# Altium PCB GMAX4651_MB.PcbDoc (part 1 of 2)
Units mm, origin at the board's own origin, x right, y up, seen from the top; angles counter-clockwise.
Board outline 185 x 150 mm, 2 copper layers (Top Layer, Bottom Layer); 162 components, 61 nets, 664 pads, 401 vias.
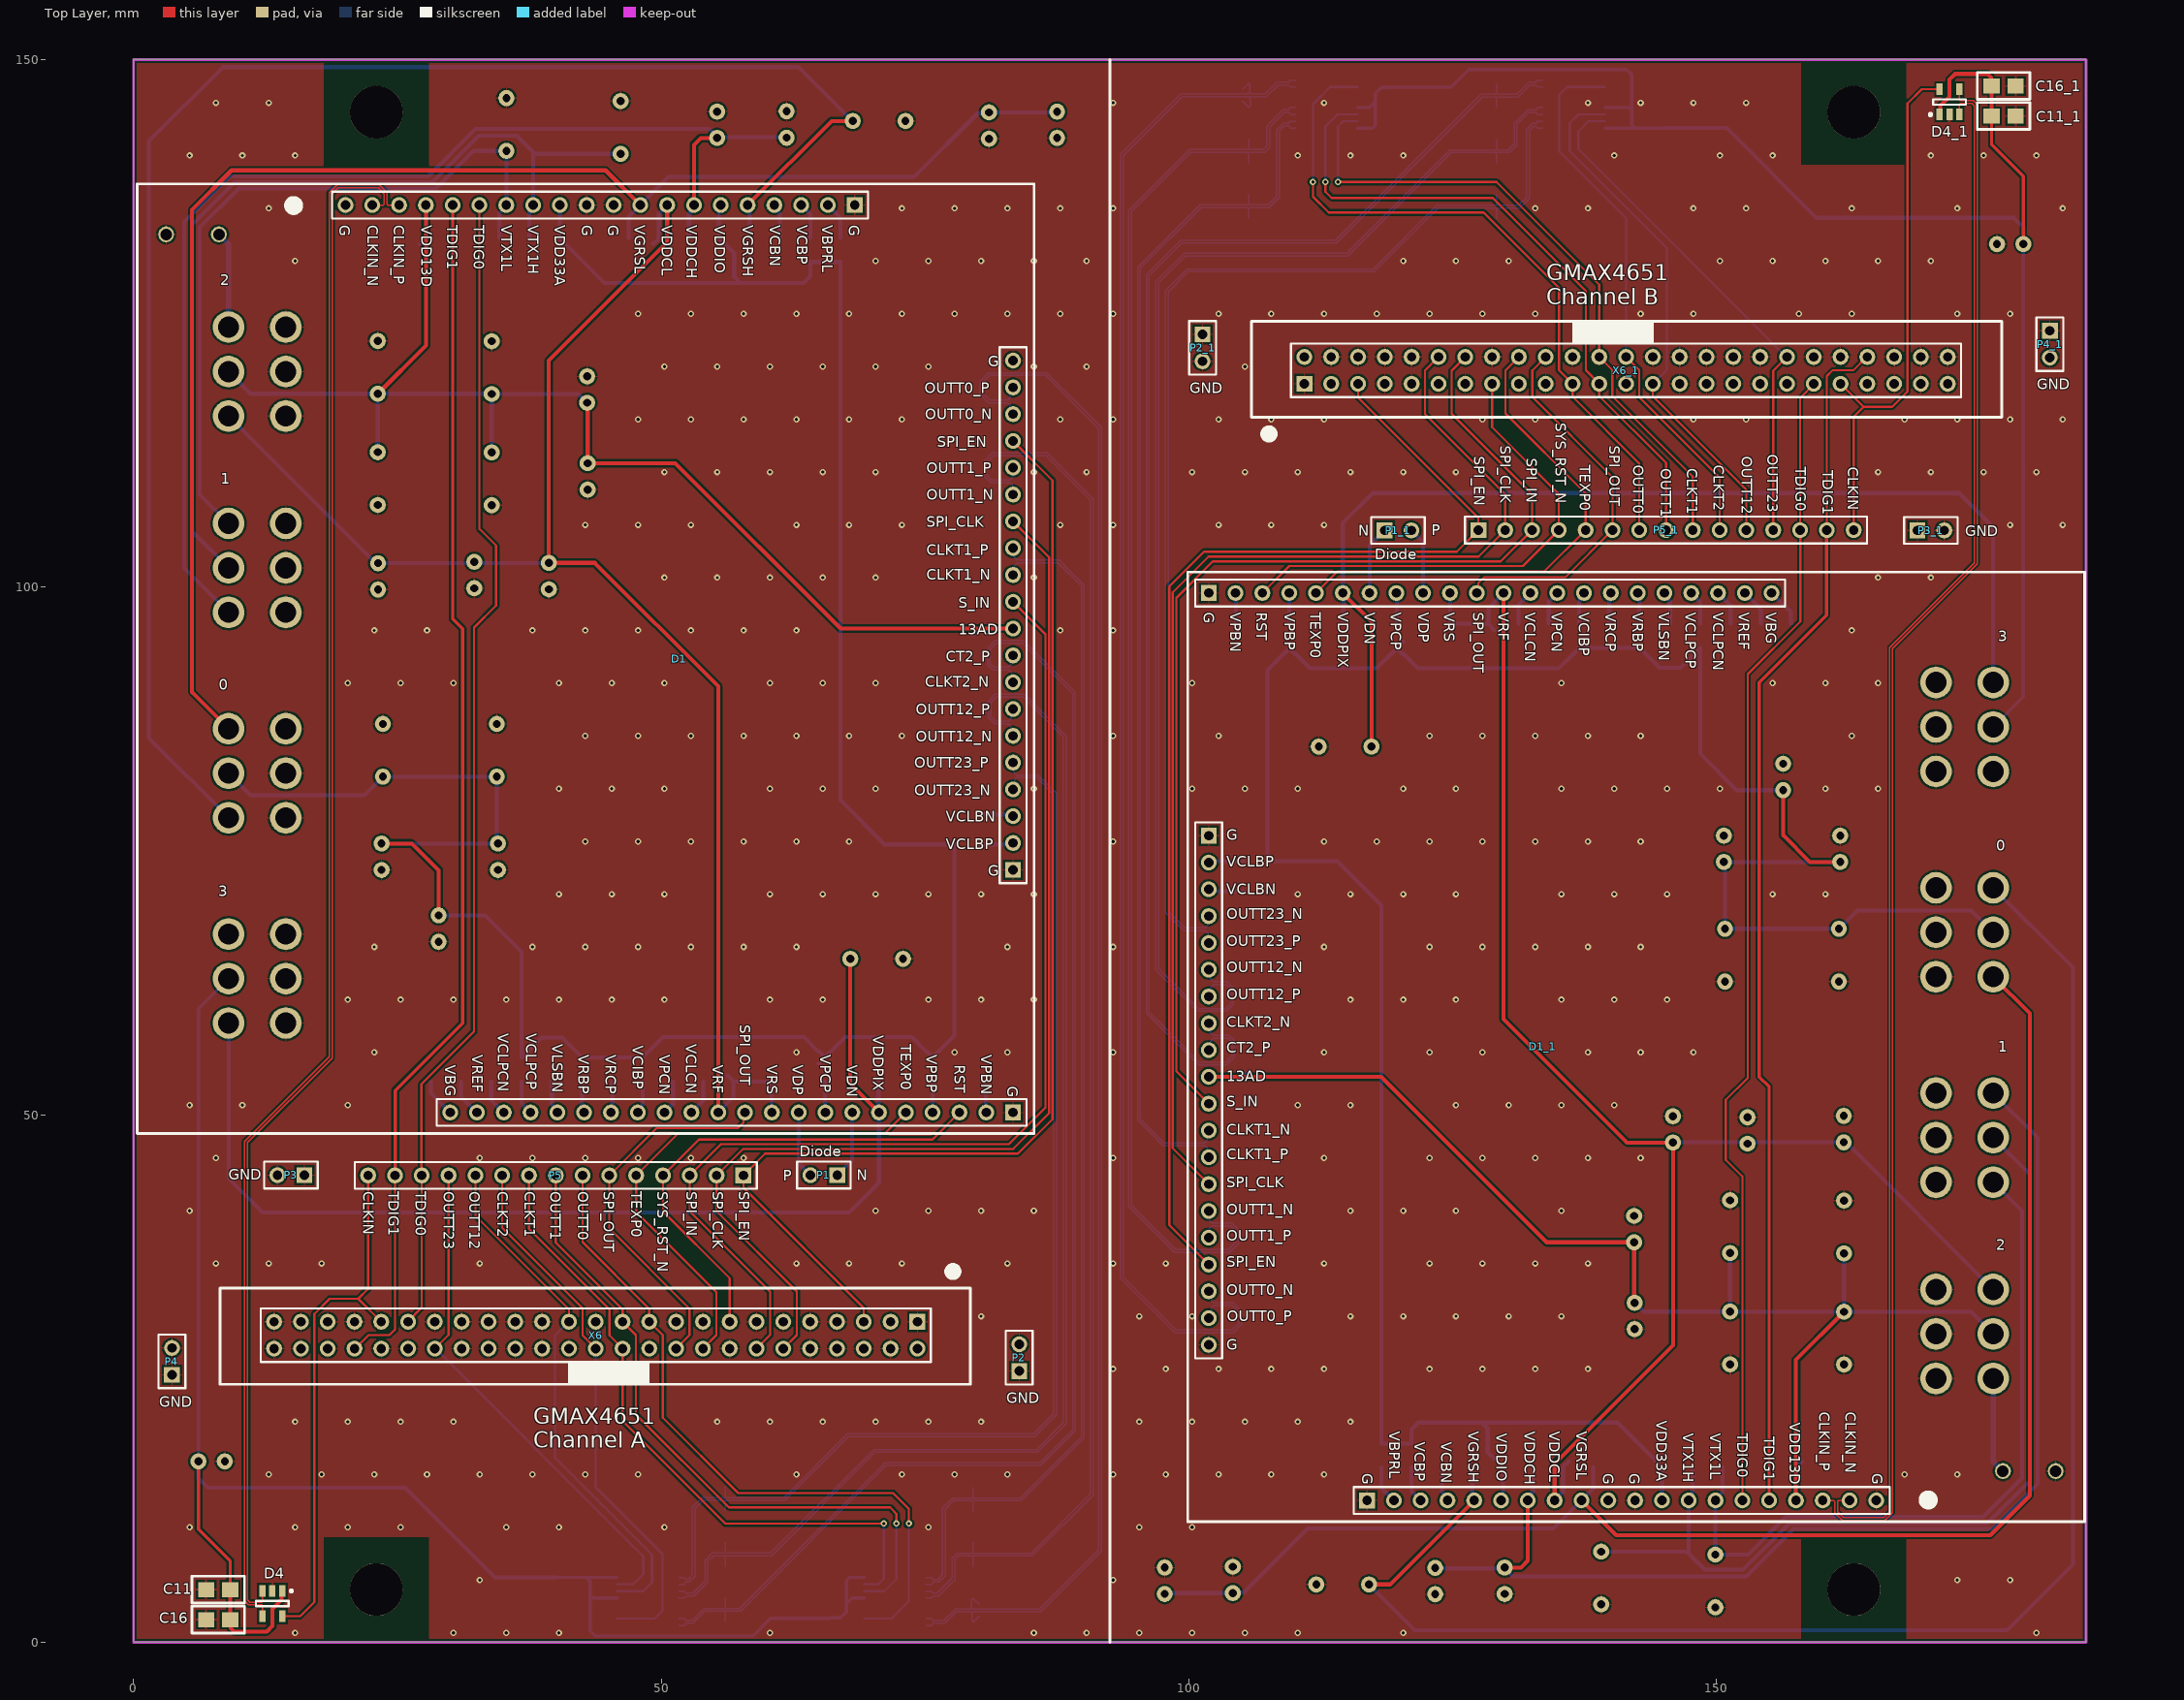
[diagram p0: Top Layer view]
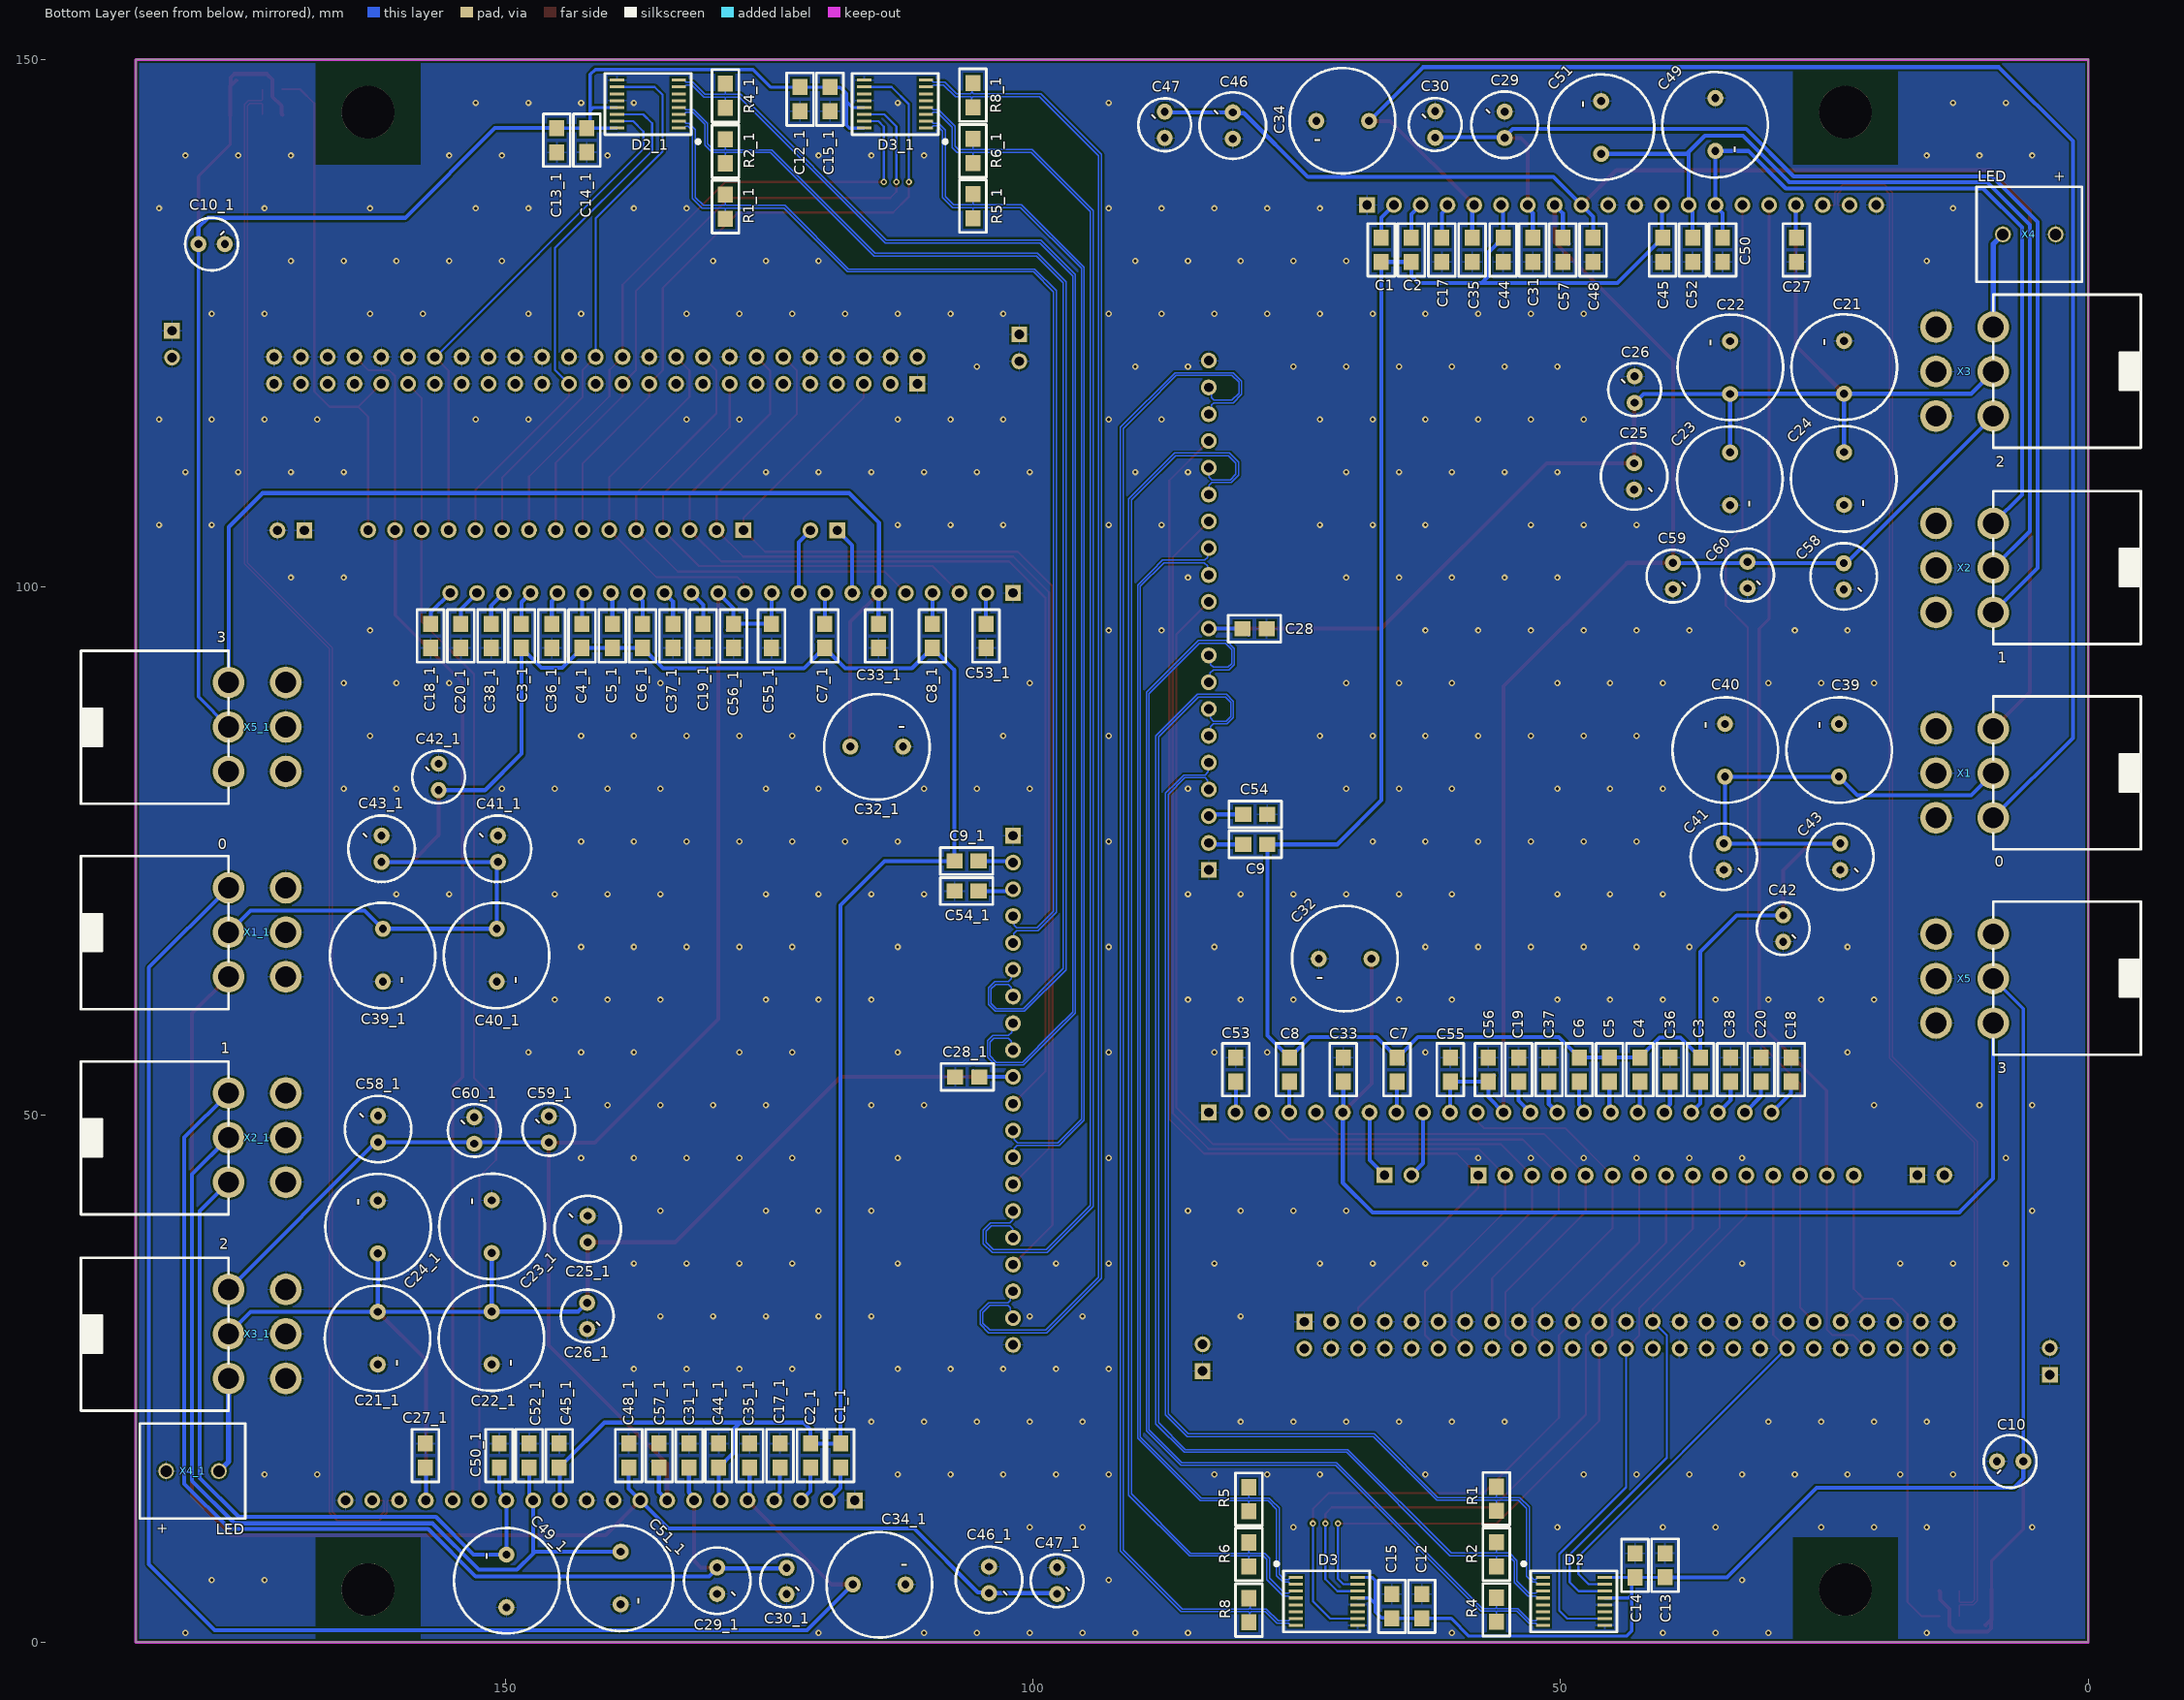
[diagram p1: Bottom Layer view, seen from below]

## Layer stack, top to bottom
Top Solder: solder mask 0.0102, Solder Resist, Dk 3.5
Top Layer: signal copper 0.0356
Dielectric 1: dielectric 0.32, FR-4, Dk 4.8
Bottom Layer: signal copper 0.0356
Bottom Solder: solder mask 0.0102, Solder Resist, Dk 3.5

## Board outline
0,0 0,150 185,150 185,0

## Design rules (kind name [scope] priority, off if disabled: settings)
BoardOutlineClearance [OnLayer('Multi-Layer')] p1: gap=0.254 ignorepadtopadclearanceinfootprint=FALSE except(0: Arc-SplitContinuation Track-SplitContinuation SMDPad-SplitContinuation THPad-SplitContinuation Via-SplitContinuation Fill-SplitContinuation Poly-SplitContinuation Region-SplitContinuation Text-SplitContinuation; 0.4: Arc-OutlineEdge Track-OutlineEdge SMDPad-OutlineEdge THPad-OutlineEdge Via-OutlineEdge Fill-OutlineEdge Poly-OutlineEdge Region-OutlineEdge Text-OutlineEdge)
Clearance [All] p1: gap=0.125 ignorepadtopadclearanceinfootprint=FALSE except(0.2: Arc-Fill Arc-Poly Track-Fill Track-Poly SMDPad-Fill SMDPad-Poly THPad-Fill THPad-Poly Via-Fill Via-Poly Fill-Fill Fill-Poly Poly-Poly Poly-Region Poly-Text; 0.25: Arc-Hole Track-Hole SMDPad-Hole THPad-Hole Via-Hole Fill-Hole Poly-Hole Region-Hole Text-Hole) // Standart
DiffPairsRouting [All] p1: maxlimit=0.254 minlimit=0.127 mostfreqgap=0.13 toplayer_minwidth=0.127 toplayer_maxwidth=0.381 toplayer_prefwidth=0.37 bottomlayer_minwidth=0.127 bottomlayer_maxwidth=0.381 bottomlayer_prefwidth=0.37 maxuncoupledlength=12.7
HoleSize [All] p1: absolutevalues=TRUE maxlimit=5 minlimit=0.3 maxpercent=80.000 minpercent=20.000
MinimumSolderMaskSliver [All] p1: minsoldermaskwidth=0.1
PlaneClearance "PlaneClearance-1 1/2 Oz" [All] p1: clearance=0.2 // Standart
PlaneConnect "TermalConnect-1 1/2 Oz" [All] p1: planeconnectstyle=Relief reliefexpansion=0.2 reliefentries=4 reliefconductorwidth=0.2 reliefairgap=0.2 // Standart
PolygonConnect "PolygonConnect-1 1/2 Oz" [All] p1: thpad.connectstyle=Relief thpad.reliefconductorwidth=0.15 thpad.reliefentries=4 thpad.polygonreliefangle="90 Angle" thpad.airgapwidth=0.2 smdpad.connectstyle=Relief smdpad.reliefconductorwidth=0.2 smdpad.reliefentries=4 smdpad.polygonreliefangle="90 Angle" smdpad.airgapwidth=0.2 via.connectstyle=Direct via.reliefconductorwidth=0.254 via.reliefentries=4 via.polygonreliefangle="90 Angle" via.airgapwidth=0.254 // Standart
RoutingVias [All] p1: holewidth=0.3 width=1.27 viastyle="Through Hole" minholewidth=0.3 minwidth=0.6 maxholewidth=0.711 maxwidth=1.27
SilkToSilkClearance [All] p1: silktosilkclearance=0
SilkToSolderMaskClearance [IsPad] p1: minsilkscreentomaskgap=0 clearancetoexposedcopper=TRUE
SolderMaskExpansion [All] p1: expansion=0.102 istentingtop=FALSE
UnRoutedNet [All] p1: checkbadconnections=TRUE
Width [All] p1: maxlimit=2.5 minlimit=0.125 preferedwidth=0.37
22 further rules are at their usual default settings.

## Classes and differential pairs
component class Sheet1_GMAX4651_MB: C1 C2 C3 C4 C5 C6 C7 C8 C9 C10 C11 C12 C13 C14 C15 C16 C17 C18 C19 C20 C21 C22 C23 C24 C25 C26 C27 C28 C29 C30 C31 C32 C33 C34 C35 C36 C37 C38 C39 C40 C41 C42 C43 C44 C45 C46 C47 C48 C49 C50 C51 C52 C53 C54 C55 C56 C57 C58 C59 C60 D1 D2 D3 D4 P1 P2 P3 P4 P5 R1 R2 R4 R5 R6 R8 X1 X2 X3 X4 X5 X6
differential pair OUTT0: +OUTT0_P -OUTT0_N
differential pair OUTT23: +OUTT23_P -OUTT23_N
differential pair OUTT12: +OUTT12_P -OUTT12_N
differential pair OUTT1: +OUTT1_P -OUTT1_N
differential pair CLKT2: +CLKT2_P -CLKT2_N
differential pair CLKT1: +CLKT1_P -CLKT1_N
differential pair CLKIN: +CLKIN_P -CLKIN_N

## Components (designator, comment, footprint, x,y, rotation, side; value= is the part's Value field where it differs from the comment)
C1 "0,1 мкФ" CAP_SMALL 68.246,134.468 r270 bottom
C1_1 "0,1 мкФ" CAP_SMALL 116.958,15.181 r90 bottom (schematic designator C1)
C2 "0,1 мкФ" CAP_SMALL 65.401,134.468 r270 bottom
C2_1 "0,1 мкФ" CAP_SMALL 119.803,15.181 r90 bottom (schematic designator C2)
C3 "0,1 мкФ" CAP_SMALL 35.48,51.765 r90 bottom
C3_1 "0,1 мкФ" CAP_SMALL 149.724,97.883 r270 bottom (schematic designator C3)
C4 "0,1 мкФ" CAP_SMALL 41.22,51.765 r90 bottom
C4_1 "0,1 мкФ" CAP_SMALL 143.984,97.883 r270 bottom (schematic designator C4)
C5 "0,1 мкФ" CAP_SMALL 44.091,51.765 r90 bottom
C5_1 "0,1 мкФ" CAP_SMALL 141.114,97.883 r270 bottom (schematic designator C5)
C6 "0,1 мкФ" CAP_SMALL 46.961,51.765 r90 bottom
C6_1 "0,1 мкФ" CAP_SMALL 138.244,97.883 r270 bottom (schematic designator C6)
C7 "0,1 мкФ" CAP_SMALL 64.233,51.765 r90 bottom
C7_1 "0,1 мкФ" CAP_SMALL 120.972,97.883 r270 bottom (schematic designator C7)
C8 "0,1 мкФ" CAP_SMALL 74.418,51.765 r90 bottom
C8_1 "0,1 мкФ" CAP_SMALL 110.786,97.883 r270 bottom (schematic designator C8)
C9 "0,1 мкФ" CAP_SMALL 81.429,74.346 r180 bottom
C9_1 "0,1 мкФ" CAP_SMALL 103.776,75.302 r0 bottom (schematic designator C9)
C10 "22 мкФ" Cap_0511_electrolitic 7.391,17.145 r0 bottom
C10_1 "22 мкФ" Cap_0511_electrolitic 177.813,132.503 r180 bottom (schematic designator C10)
C11 "0,1 мкФ" CAP_SMALL 5.499,3.724 r0 top
C11_1 "0,1 мкФ" CAP_SMALL 179.705,145.924 r180 top (schematic designator C11)
C12 "0,1 мкФ" CAP_SMALL 64.411,5.918 r270 bottom
C12_1 "0,1 мкФ" CAP_SMALL 120.794,143.73 r90 bottom (schematic designator C12)
C13 "0,1 мкФ" CAP_SMALL 41.373,9.804 r270 bottom
C13_1 "0,1 мкФ" CAP_SMALL 143.832,139.844 r90 bottom (schematic designator C13)
C14 "0,01 мкФ" CAP_SMALL 44.206,9.795 r270 bottom
C14_1 "0,01 мкФ" CAP_SMALL 140.998,139.853 r90 bottom (schematic designator C14)
C15 "0,01 мкФ" CAP_SMALL 67.25,5.918 r270 bottom
C15_1 "0,01 мкФ" CAP_SMALL 117.954,143.73 r90 bottom (schematic designator C15)
C16 "0,01 мкФ" CAP_SMALL 5.499,0.88 r0 top
C16_1 "0,01 мкФ" CAP_SMALL 179.705,148.769 r180 top (schematic designator C16)
C17 "0,1 мкФ" CAP_SMALL 62.506,134.468 r270 bottom
C17_1 "0,1 мкФ" CAP_SMALL 122.699,15.181 r90 bottom (schematic designator C17)
C18 "0,1 мкФ" CAP_SMALL 26.869,51.765 r90 bottom
C18_1 "0,1 мкФ" CAP_SMALL 158.335,97.883 r270 bottom (schematic designator C18)
C19 "0,1 мкФ" CAP_SMALL 52.701,51.765 r90 bottom
C19_1 "0,1 мкФ" CAP_SMALL 132.503,97.883 r270 bottom (schematic designator C19)
C20 "0,1 мкФ" CAP_SMALL 29.74,51.765 r90 bottom
C20_1 "0,1 мкФ" CAP_SMALL 155.465,97.883 r270 bottom (schematic designator C20)
C21 "330 мкФ" Cap_1013_electrolitic 23.136,120.828 r90 bottom
C21_1 "330 мкФ" Cap_1013_electrolitic 162.069,28.82 r270 bottom (schematic designator C21)
C22 "330 мкФ" Cap_1013_electrolitic 33.931,120.802 r90 bottom
C22_1 "330 мкФ" Cap_1013_electrolitic 151.274,28.846 r270 bottom (schematic designator C22)
C23 "330 мкФ" Cap_1013_electrolitic 33.931,110.261 r270 bottom
C23_1 "330 мкФ" Cap_1013_electrolitic 151.274,39.387 r90 bottom (schematic designator C23)
C24 "330 мкФ" Cap_1013_electrolitic 23.136,110.287 r270 bottom
C24_1 "330 мкФ" Cap_1013_electrolitic 162.069,39.361 r90 bottom (schematic designator C24)
C25 "100 мкФ" Cap_0612_electrolitic 43.024,110.49 r270 bottom
C25_1 "100 мкФ" Cap_0612_electrolitic 142.181,39.158 r90 bottom (schematic designator C25)
C26 "22 мкФ" Cap_0511_electrolitic 42.973,118.72 r90 bottom
C26_1 "22 мкФ" Cap_0511_electrolitic 142.231,30.929 r270 bottom (schematic designator C26)
C27 "0,1 мкФ" CAP_SMALL 28.927,134.468 r270 bottom
C27_1 "0,1 мкФ" CAP_SMALL 156.278,15.181 r90 bottom (schematic designator C27)
C28 "0,1 мкФ" CAP_SMALL 81.505,94.793 r180 bottom
C28_1 "0,1 мкФ" CAP_SMALL 103.7,54.855 r0 bottom (schematic designator C28)
C29 "100 мкФ" Cap_0612_electrolitic 55.296,143.815 r90 bottom
C29_1 "100 мкФ" Cap_0612_electrolitic 129.909,5.833 r270 bottom (schematic designator C29)
C30 "22 мкФ" Cap_0511_electrolitic 61.874,143.84 r90 bottom
C30_1 "22 мкФ" Cap_0511_electrolitic 123.33,5.808 r270 bottom (schematic designator C30)
C31 "0,1 мкФ" CAP_SMALL 53.895,134.468 r270 bottom
C31_1 "0,1 мкФ" CAP_SMALL 131.309,15.181 r90 bottom (schematic designator C31)
C32 "330 мкФ" Cap_1013_electrolitic 70.405,64.77 r0 bottom
C32_1 "330 мкФ" Cap_1013_electrolitic 114.799,84.878 r180 bottom (schematic designator C32)
C33 "0,1 мкФ" CAP_SMALL 69.313,51.765 r90 bottom
C33_1 "0,1 мкФ" CAP_SMALL 115.892,97.883 r270 bottom (schematic designator C33)
C34 "330 мкФ" Cap_1013_electrolitic 70.637,144.17 r0 bottom
C34_1 "330 мкФ" Cap_1013_electrolitic 114.567,5.478 r180 bottom (schematic designator C34)
C35 "0,1 мкФ" CAP_SMALL 59.635,134.468 r270 bottom
C35_1 "0,1 мкФ" CAP_SMALL 125.569,15.181 r90 bottom (schematic designator C35)
C36 "0,1 мкФ" CAP_SMALL 38.35,51.765 r90 bottom
C36_1 "0,1 мкФ" CAP_SMALL 146.854,97.883 r270 bottom (schematic designator C36)
C37 "0,1 мкФ" CAP_SMALL 49.831,51.765 r90 bottom
C37_1 "0,1 мкФ" CAP_SMALL 135.373,97.883 r270 bottom (schematic designator C37)
C38 "0,1 мкФ" CAP_SMALL 32.61,51.765 r90 bottom
C38_1 "0,1 мкФ" CAP_SMALL 152.595,97.883 r270 bottom (schematic designator C38)
C39 "330 мкФ" Cap_1013_electrolitic 23.618,84.531 r90 bottom
C39_1 "330 мкФ" Cap_1013_electrolitic 161.586,65.117 r270 bottom (schematic designator C39)
C40 "330 мкФ" Cap_1013_electrolitic 34.413,84.531 r90 bottom
C40_1 "330 мкФ" Cap_1013_electrolitic 150.791,65.117 r270 bottom (schematic designator C40)
C41 "100 мкФ" Cap_0612_electrolitic 34.515,74.447 r270 bottom
C41_1 "100 мкФ" Cap_0612_electrolitic 150.69,75.201 r90 bottom (schematic designator C41)
C42 "10 мкФ" Cap_0511_electrolitic 28.901,67.64 r270 bottom
C42_1 "10 мкФ" Cap_0511_electrolitic 156.303,82.008 r90 bottom (schematic designator C42)
C43 "47 мкФ" Cap_0612_electrolitic 23.491,74.447 r270 bottom
C43_1 "47 мкФ" Cap_0612_electrolitic 161.713,75.201 r90 bottom (schematic designator C43)
C44 "0,1 мкФ" CAP_SMALL 56.714,134.468 r270 bottom
C44_1 "0,1 мкФ" CAP_SMALL 128.49,15.181 r90 bottom (schematic designator C44)
C45 "0,1 мкФ" CAP_SMALL 41.601,134.468 r270 bottom
C45_1 "0,1 мкФ" CAP_SMALL 143.603,15.181 r90 bottom (schematic designator C45)
C46 "100 мкФ" Cap_0612_electrolitic 81.051,143.739 r90 bottom
C46_1 "100 мкФ" Cap_0612_electrolitic 104.153,5.91 r270 bottom (schematic designator C46)
C47 "22 мкФ" Cap_0511_electrolitic 87.503,143.815 r90 bottom
C47_1 "22 мкФ" Cap_0511_electrolitic 97.701,5.833 r270 bottom (schematic designator C47)
C48 "0,1 мкФ" CAP_SMALL 48.18,134.468 r270 bottom
C48_1 "0,1 мкФ" CAP_SMALL 137.024,15.181 r90 bottom (schematic designator C48)
C49 "220 мкФ" Cap_1013_electrolitic 35.328,143.84 r270 bottom
C49_1 "220 мкФ" Cap_1013_electrolitic 149.877,5.808 r90 bottom (schematic designator C49)
C50 "0,1 мкФ" CAP_SMALL 35.912,134.468 r270 bottom
C50_1 "0,1 мкФ" CAP_SMALL 149.293,15.181 r90 bottom (schematic designator C50)
C51 "220 мкФ" Cap_1013_electrolitic 46.148,143.561 r90 bottom
C51_1 "220 мкФ" Cap_1013_electrolitic 139.056,6.087 r270 bottom (schematic designator C51)
C52 "0,1 мкФ" CAP_SMALL 38.757,134.468 r270 bottom
C52_1 "0,1 мкФ" CAP_SMALL 146.448,15.181 r90 bottom (schematic designator C52)
C53 "0,1 мкФ" CAP_SMALL 79.498,51.765 r90 bottom
C53_1 "0,1 мкФ" CAP_SMALL 105.706,97.883 r270 bottom (schematic designator C53)
C54 "0,1 мкФ" CAP_SMALL 81.429,77.191 r180 bottom
C54_1 "0,1 мкФ" CAP_SMALL 103.776,72.458 r0 bottom (schematic designator C54)
C55 "0,1 мкФ" CAP_SMALL 59.178,51.765 r90 bottom
C55_1 "0,1 мкФ" CAP_SMALL 126.026,97.883 r270 bottom (schematic designator C55)
C56 "0,1 мкФ" CAP_SMALL 55.571,51.765 r90 bottom
C56_1 "0,1 мкФ" CAP_SMALL 129.633,97.883 r270 bottom (schematic designator C56)
C57 "0,1 мкФ" CAP_SMALL 51.05,134.468 r270 bottom
C57_1 "0,1 мкФ" CAP_SMALL 134.154,15.181 r90 bottom (schematic designator C57)
C58 "100 мкФ" Cap_0612_electrolitic 23.161,101.016 r270 bottom
C58_1 "100 мкФ" Cap_0612_electrolitic 162.043,48.632 r90 bottom (schematic designator C58)
C59 "22 мкФ" Cap_0511_electrolitic 39.341,101.041 r270 bottom
C59_1 "22 мкФ" Cap_0511_electrolitic 145.864,48.607 r90 bottom (schematic designator C59)
C60 "22 мкФ" Cap_0511_electrolitic 32.28,101.143 r270 bottom
C60_1 "22 мкФ" Cap_0511_electrolitic 152.925,48.505 r90 bottom (schematic designator C60)
D1 "GMAX4651_MEZ" GMAX4651_MEZ 20.072,136.208 r270 top
D1_1 "GMAX4651_MEZ" GMAX4651_MEZ 165.132,13.44 r90 top (schematic designator D1)
D2 "SN65LVDS048A" "SN65LVDS048A (4LVDS)" 51.66,6.147 r270 bottom
D2_1 "SN65LVDS048A" "SN65LVDS048A (4LVDS)" 133.545,143.501 r90 bottom (schematic designator D2)
D3 "SN65LVDS048A" "SN65LVDS048A (4LVDS)" 75.079,6.147 r270 bottom
D3_1 "SN65LVDS048A" "SN65LVDS048A (4LVDS)" 110.126,143.501 r90 bottom (schematic designator D3)
D4 "DS90LV011A" DS90LV011A 13.142,3.664 r270 top
D4_1 "DS90LV011A" DS90LV011A 172.062,145.984 r90 top (schematic designator D4)
P1 "Diode" HDR1X2 66.671,44.272 r180 top
P1_1 "Diode" HDR1X2 118.533,105.376 r0 top (schematic designator P1)
P2 "GND" HDR1X2 83.918,25.705 r90 top
P2_1 "GND" HDR1X2 101.287,123.943 r270 top (schematic designator P2)
P3 "GND" HDR1X2 16.176,44.272 r180 top
P3_1 "GND" HDR1X2 169.028,105.376 r0 top (schematic designator P3)
P4 "GND" HDR1X2 3.632,25.349 r90 top
P4_1 "GND" HDR1X2 181.572,124.299 r270 top (schematic designator P4)
P5 "Header 15" HDR1X15 57.781,44.247 r180 top
P5_1 "Header 15" HDR1X15 127.423,105.401 r0 top (schematic designator P5)
R1 "100" RES 54.835,16.078 r0 bottom
R1_1 "100" RES 130.37,133.57 r180 bottom (schematic designator R1)
R2 "100" RES 54.835,10.82 r0 bottom
R2_1 "100" RES 130.37,138.828 r180 bottom (schematic designator R2)
R4 "100" RES 54.835,5.563 r0 bottom
R4_1 "100" RES 130.37,144.086 r180 bottom (schematic designator R4)
R5 "100" RES 78.279,16.027 r0 bottom
R5_1 "100" RES 106.925,133.621 r180 bottom (schematic designator R5)
R6 "100" RES 78.279,10.795 r0 bottom
R6_1 "100" RES 106.925,138.853 r180 bottom (schematic designator R6)
R8 "100" RES 78.279,5.512 r0 bottom
R8_1 "100" RES 106.925,144.136 r180 bottom (schematic designator R8)
X1 "0" POWER 8.999,78.143 r270 bottom
X1_1 "0" POWER 176.205,71.505 r90 bottom (schematic designator X1)
X2 "1" POWER 8.999,97.602 r270 bottom
X2_1 "1" POWER 176.205,52.046 r90 bottom (schematic designator X2)
X3 "2" POWER 8.999,116.208 r270 bottom
X3_1 "2" POWER 176.205,33.44 r90 bottom (schematic designator X3)
X4 "LED" KLEMMNIK_2 8.077,133.426 r180 bottom
X4_1 "LED" KLEMMNIK_2 177.127,16.222 r0 bottom (schematic designator X4)
X5 "3" POWER 8.999,58.684 r270 bottom
X5_1 "3" POWER 176.205,90.964 r90 bottom (schematic designator X5)
X6 "IDC_7953" IDC_7953 74.266,30.378 r180 top
X6_1 "IDC_7953" IDC_7953 110.939,119.27 r0 top (schematic designator X6)

## Footprints (in the part's own frame and the unit in brackets; to place one, negate y for a bottom-side part, rotate by r counter-clockwise, add the part's x,y. Pads: shape width x height; smd on the part's side, far side on the other; paste and mask are expansions set on the pad)
Cap_0511_electrolitic [mil]
  round 60 hole 30: 1(-49.21,0) 2(49.21,0)
  silkscreen extent -98,-98 98,98
Cap_0612_electrolitic [mil]
  round 60 hole 30: 1(-49.21,0) 2(49.21,0)
  silkscreen extent -124,-124 124,124
Cap_1013_electrolitic [mil]
  round 60 hole 30: 1(-98.43,0) 2(98.43,0)
  silkscreen extent -196,-198 198,196
CAP_SMALL [mil] "FROM_MAX"
  rect 60x55.98 smd: 1(53.71,50) 2(143.71,50)
  silkscreen extent 1,0 197,100, body extent 20,18 178,82, height 100
DS90LV011A [mm] "LVDS Driver 1 ch"
  rect 1.1x0.6 smd: 1(-1.2,0.95) 2(-1.2,0) 3(-1.2,-0.95) 4(1.2,-0.95) 5(1.2,0.95)
  silkscreen extent -1.32,-1.55 0.25,1.92, body extent -0.87,-1.52 0.87,1.52, height 1.45
GMAX4651_MEZ [mm] "GMAX4651_MEZ"
  rect 1.5x1.5 hole 0.9: 1(0,48.26) 42(86,63.26) 43(63,63.26)
  round 1.5 hole 0.9: 2(0,45.72) 3(0,43.18) 4(0,40.64) 5(0,38.1) 6(0,35.56) 7(0,33.02) 8(0,30.48) 9(0,27.94) 10(0,25.4) 11(0,22.86) 12(0,20.32) 13(0,17.78) 14(0,15.24) 15(0,12.7) 16(0,10.16) 17(0,7.62) 18(0,5.08) 19(0,2.54) 20(0,0) 21(86,9.92) 22(86,12.46) 23(86,15) 24(86,17.54) 25(86,20.08) 26(86,22.62) 27(86,25.16) 28(86,27.7) 29(86,30.24) 30(86,32.78) 31(86,35.32) 32(86,37.86) 33(86,40.4) 34(86,42.94) 35(86,45.48) 36(86,48.02) 37(86,50.56) 38(86,53.1) 39(86,55.64) 40(86,58.18) 41(86,60.72) 44(60.46,63.26) 45(57.92,63.26) 46(55.38,63.26) 47(52.84,63.26) 48(50.3,63.26) 49(47.76,63.26) 50(45.22,63.26) 51(42.68,63.26) 52(40.14,63.26) 53(37.6,63.26) 54(35.06,63.26) 55(32.52,63.26) 56(29.98,63.26) 57(27.44,63.26) 58(24.9,63.26) 59(22.36,63.26) 60(19.82,63.26) 61(17.28,63.26) 62(14.74,63.26)
  silkscreen extent -2,-19.74 87.99,65.25
HDR1X2 [mm] "Connector; Header; 2 Position"
  rect 1.5x1.5 hole 0.9: 1(0,0)
  round 1.5 hole 0.9: 2(2.54,0)
  silkscreen extent -1.27,-1.27 3.81,1.27
HDR1X15 [mm] "Connector; Header; 15 Position"
  rect 1.5x1.5 hole 0.9: 1(0,0)
  round 1.5 hole 0.9: 2(2.54,0) 3(5.08,0) 4(7.62,0) 5(10.16,0) 6(12.7,0) 7(15.24,0) 8(17.78,0) 9(20.32,0) 10(22.86,0) 11(25.4,0) 12(27.94,0) 13(30.48,0) 14(33.02,0) 15(35.56,0)
  silkscreen extent -1.27,-1.27 36.83,1.27
IDC_7953 [mm]
  rect 1.5x1.5 hole 0.9: 1(0,0)
  round 1.5 hole 0.9: 2(0,2.54) 3(2.54,0) 4(2.54,2.54) 5(5.08,0) 6(5.08,2.54) 7(7.62,0) 8(7.62,2.54) 9(10.16,0) 10(10.16,2.54) 11(12.7,0) 12(12.7,2.54) 13(15.24,0) 14(15.24,2.54) 15(17.78,0) 16(17.78,2.54) 17(20.32,0) 18(20.32,2.54) 19(22.86,0) 20(22.86,2.54) 21(25.4,0) 22(25.4,2.54) 23(27.94,0) 24(27.94,2.54) 25(30.48,0) 26(30.48,2.54) 27(33.02,0) 28(33.02,2.54) 29(35.56,0) 30(35.56,2.54) 31(38.1,0) 32(38.1,2.54) 33(40.64,0) 34(40.64,2.54) 35(43.18,0) 36(43.18,2.54) 37(45.72,0) 38(45.72,2.54) 39(48.26,0) 40(48.26,2.54) 41(50.8,0) 42(50.8,2.54) 43(53.34,0) 44(53.34,2.54) 45(55.88,0) 46(55.88,2.54) 47(58.42,0) 48(58.42,2.54) 49(60.96,0) 50(60.96,2.54)
  silkscreen extent -5.03,-5.14 66.07,5.92
KLEMMNIK_2 [mm]
  round 1.5 hole 1.1: 1(0,0) 2(5,0)
  silkscreen extent -2.5,-4.5 7.5,4.5
POWER [mm] "POWER"
  round 3 hole 2: 1(0,0) 2(-4.217,0) 3(-8.435,0) 4(-8.435,-5.422) 5(-4.217,-5.422) 6(0,-5.422)
  silkscreen extent -11.5,0 3,14
RES [mil] "FROM_MAX"
  rect 55.98x60 smd: 1(49,52.71) 2(49,142.71)
  silkscreen extent -1,0 99,196, body extent 17,19 81,177, height 100
"SN65LVDS048A (4LVDS)" [mm]
  rect 0.28x1.35 smd: 1(0,0) 2(0.65,0) 3(1.3,0) 4(1.95,0) 5(2.6,0) 6(3.25,0) 7(3.9,0) 8(4.55,0) 9(4.55,5.85) 10(3.9,5.85) 11(3.25,5.85) 12(2.6,5.85) 13(1.95,5.85) 14(1.3,5.85) 15(0.65,5.85) 16(0,5.85)
  silkscreen extent -1.49,-2.03 5.18,7

## Part data
C1 C1_1 C2 C2_1 C3 C3_1 C4 C4_1 C5 C5_1 C6 C6_1 C7 C7_1 C8 C8_1 C9 C9_1 C11 C11_1 C12 C12_1 C13 C13_1 C14 C14_1 C15 C15_1 C16 C16_1 C17 C17_1 C18 C18_1 C19 C19_1 C20 C20_1 C27 C27_1 C28 C28_1 C31 C31_1 C33 C33_1 C35 C35_1 C36 C36_1 C37 C37_1 C38 C38_1 C44 C44_1 C45 C45_1 C48 C48_1 C50 C50_1 C52 C52_1 C53 C53_1 C54 C54_1 C55 C55_1 C56 C56_1 C57 C57_1: library part CAP_SMALL
C10 C10_1 C26 C26_1 C30 C30_1 C42 C42_1 C47 C47_1 C59 C59_1 C60 C60_1: library part Cap_electrolotoc_0511
C21 C21_1 C22 C22_1 C23 C23_1 C24 C24_1 C32 C32_1 C34 C34_1 C39 C39_1 C40 C40_1 C49 C49_1 C51 C51_1: library part Cap_electrolotoc_1013
C25 C25_1 C29 C29_1 C41 C41_1 C43 C43_1 C46 C46_1 C58 C58_1: library part Cap_electrolotoc_0612
D2 D2_1 D3 D3_1: library part "SN65LVDS048A (4LVDS)"
D4 D4_1: "LVDS Driver 1 ch"
P1 P1_1 P2 P2_1 P3 P3_1 P4 P4_1: library part "Header 2", "Header, 2-Pin", LatestRevisionDate=17-Jul-2002, LatestRevisionNote="Re-released for DXP Platform.", Publisher="Altium Limited"
P5 P5_1: "Header, 15-Pin", LatestRevisionDate=17-Jul-2002, LatestRevisionNote="Re-released for DXP Platform.", Publisher="Altium Limited"
R1 R1_1 R2 R2_1 R4 R4_1 R5 R5_1 R6 R6_1 R8 R8_1: library part RES
X1 X1_1 X2 X2_1 X3 X3_1 X5 X5_1: library part POWER
X4 X4_1: library part KLEMMNIK_2

## Free pads (board coordinates)
  round 5 hole 5 unplated: H(23,5) H(23,145) H(163,5) H(163,145)

## Via types
v1: diameter 0.6, hole 0.3, Top Layer to Bottom Layer, 401 vias

## Nets (pads, with @x,y where several pads share a name; then routed paths per layer and width w, separated by ;. In a path a pad name is that pad's centre, name@x,y a point inside that pad or via, vN(x,y) a via of type N, cw(c..) or ccw(c..) an arc to the next point about the centre after c; other vN are vias at no path point)
3,3V_LVDS: C10.1 C11.2 C12.2 C13.2 C14.2 C15.2 C16.2 D2.13 D2.16 D3.13 D3.16 D4.1 X5.2 | length 158
  Top Layer w0.305: C10.1@6.141,17.145 6.141,10.724 9.15,7.716 C11.2@9.15,4.994
  Top Layer w0.381: C11.2@9.15,4.994 C16.2@9.15,2.15 C16.2@9.201,2.15 ; C16.2@9.721,1.629 C16.2@9.201,2.15 ; D4.1@14.092,4.864 14.021,4.793 14.021,4.039 13.157,3.175 13.157,1.549 12.624,1.016 9.525,1.016 9.201,1.34 C16.2@9.201,2.15
  Bottom Layer w0.305: C10.1@6.147,17.145 6.147,60.049 X5.2@8.999,62.902 ; C13.2@40.112,6.145 C14.2@42.936,6.145 ; D2.13@45.81,4.197 43.555,4.197 43.256,4.496 ; D2.16@45.81,6.147 42.938,6.147 C14.2@42.936,6.145 ; D3.13@69.229,4.197 68.103,4.197 67.539,3.632 ; D3.16@69.229,6.147 67.818,6.147 67.539,5.867 67.539,3.632 ; C14.2@42.936,6.145 43.256,5.825 43.256,4.496 ; 43.256,4.496 43.256,1.067 43.739,0.584 58.674,0.584 60.358,2.268 C12.2@63.141,2.268 C15.2@65.98,2.268 66.014,2.302 66.97,2.302 67.539,2.87 67.539,3.632
  Bottom Layer w0.381: C10.1@6.141,17.145 6.141,15.55 7.036,14.656 25.73,14.656 34.241,6.145 C13.2@40.112,6.145
CLKIN: D4.5 P5.15 X6.41 | length 50.8
  Top Layer w0.203: D4.5@14.092,2.464 15.773,2.464 17.12,3.81 17.12,31.115 18.567,32.563 21.281,32.563 ; P5.15@22.221,44.247 22.221,33.503 21.281,32.563 ; X6.41@23.466,30.378 21.281,32.563
CLKIN_N: D1.19 D4.3 | length 147
  Top Layer w0.127: D4.3@12.192,4.864 12.192,3.867 12.118,3.792 10.998,3.792 10.77,4.021 10.77,47.346 18.799,55.375 18.799,137.265 19.38,137.846 23.165,137.846 23.754,137.257 23.754,136.282 23.679,136.208 D1.19@22.612,136.208
  Bottom Layer w0.381: D1.19@22.612,136.208 D1.19@22.915,136.208
CLKIN_P: D1.18 D4.4 | length 148
  Top Layer w0.127: D4.4@12.192,2.464 12.192,3.461 12.118,3.535 10.892,3.535 10.513,3.914 10.513,47.452 18.542,55.481 18.542,137.371 19.274,138.103 23.271,138.103 24.011,137.363 24.011,136.282 24.085,136.208 D1.18@25.152,136.208
CLKT1: D3.15 P5.9 X6.24 | length 63
  Top Layer w0.203: P5.9@37.461,44.247 37.461,39.171 45.085,31.547 45.085,29.079 X6.24@46.326,27.838 46.326,20.984 56.058,11.252 v1(71.095,11.252)
  Bottom Layer w0.203: D3.15@69.229,5.497 70.572,5.497 71.095,6.02 v1(71.095,11.252)
CLKT1_N: D1.54 D3.1 R5.1 | length 114.1
  Bottom Layer w0.127: D3.1@75.079,6.147 75.614,6.147 75.69,6.07 75.69,6.022 75.764,5.947 76.178,5.947 76.657,6.426 76.657,12.725 77.368,13.437 77.373,13.437 77.609,13.673 79.453,13.673 79.524,13.743 ; R5.1@79.524,14.689 79.524,13.743 ; D1.54@83.332,101.148 83.447,101.262 83.447,102.014 83.741,102.308 87.582,102.308 89.814,100.076 89.814,77.47 89.814,19.444 84.042,13.671 79.595,13.671 79.524,13.743
CLKT1_P: D1.55 D3.2 R5.2 | length 114.9
  Bottom Layer w0.127: D3.2@75.079,5.497 75.614,5.497 75.69,5.573 75.69,5.619 75.764,5.693 76.288,5.693 76.914,6.32 76.914,12.619 77.712,13.417 77.714,13.416 79.248,13.416 ; 79.248,13.417 79.462,13.417 79.524,13.355 79.524,13.334 ; R5.2@79.524,12.403 79.524,13.334 ; D1.55@83.332,103.688 83.462,103.559 83.462,102.822 83.718,102.565 87.689,102.565 88.737,101.517 88.828,101.426 90.071,100.182 90.071,77.47 90.071,19.337 84.151,13.417 79.606,13.417 79.524,13.334
CLKT2: D2.10 P5.10 X6.26 | length 52.2
  Top Layer w0.203: P5.10@34.921,44.247 34.921,39.272 42.545,31.648 42.545,29.079 X6.26@43.786,27.838
  Bottom Layer w0.203: X6.26@43.786,27.838 43.786,14.685 50.114,8.357 50.114,2.997 49.364,2.247 D2.10@45.81,2.247
CLKT2_N: D1.50 D2.8 R4.2 | length 132
  Bottom Layer w0.127: D2.8@51.66,1.597 52.195,1.597 52.271,1.673 52.271,1.719 52.346,1.793 52.982,1.793 54.141,2.952 56.001,2.952 56.079,2.874 ; R4.2@56.079,1.938 56.079,2.874 ; D1.50@83.332,90.988 83.2,91.121 83.2,91.854 82.906,92.148 81.402,92.148 80.896,92.654 80.896,94.188 81.656,94.948 84.307,94.948 89.233,90.022 89.233,77.47 89.233,20.036 85.961,16.764 71.331,16.764 57.519,2.952 56.158,2.952 56.079,2.874
CLKT2_P: D1.51 D2.7 R4.1 | length 130.3
  Bottom Layer w0.127: D2.7@51.66,2.247 52.195,2.247 52.271,2.17 52.271,2.125 52.346,2.05 52.876,2.05 54.035,3.209 56.005,3.209 56.079,3.284 ; R4.1@56.079,4.224 56.079,3.284 ; D1.51@83.332,93.528 83.162,93.358 83.162,92.662 82.906,92.405 81.509,92.405 81.153,92.761 81.153,94.082 81.763,94.691 84.201,94.691 87.169,91.723 87.351,91.542 88.976,89.916 88.976,77.47 88.976,20.142 85.855,17.021 71.225,17.021 57.413,3.209 57.2,3.209 56.141,3.209 56.079,3.271 56.079,3.284
GND: C10.2 C10_1.2 C11.1 C11_1.1 C12.1 C12_1.1 C13.1 C13_1.1 C14.1 C14_1.1 C15.1 C15_1.1 C16.1 C16_1.1 C17.2 C17_1.2 C18.2 C18_1.2 C19.2 C19_1.2 C20.2 C20_1.2 C21.2 C21_1.2 C22.2 C22_1.2 C23.2 C23_1.2 C24.2 C24_1.2 C25.2 C25_1.2 C26.2 C26_1.2 C27.2 C27_1.2 C28.2 C28_1.2 C29.2 C29_1.2 C30.2 C30_1.2 C31.2 C31_1.2 C32.2 C32_1.2 C33.2 C33_1.2 C34.2 C34_1.2 C35.2 C35_1.2 C36.2 C36_1.2 C37.2 C37_1.2 C38.2 C38_1.2 C39.2 C39_1.2 C40.2 C40_1.2 C41.2 C41_1.2 C42.2 C42_1.2 C43.2 C43_1.2 C44.2 C44_1.2 C45.2 C45_1.2 C46.1 C46_1.1 C47.1 C47_1.1 C48.2 C48_1.2 C49.1 C49_1.1 C50.2 C50_1.2 C51.2 C51_1.2 C52.2 C52_1.2 C53.2 C53_1.2 C54.2 C54_1.2 C55.2 C55_1.2 C56.2 C56_1.2 C57.2 C57_1.2 C58.2 C58_1.2 C59.2 C59_1.2 C60.2 C60_1.2 D1.1 D1.10 D1.11 D1.20 D1.42 D1.43 D1.62 D1_1.1 D1_1.10 D1_1.11 D1_1.20 D1_1.42 D1_1.43 D1_1.62 D2.9 D2.12 D2_1.9 D2_1.12 D3.9 D3.12 D3_1.9 D3_1.12 D4.2 D4_1.2 P2.1 P2.2 P2_1.1 P2_1.2 P3.1 P3.2 P3_1.1 P3_1.2 P4.1 P4.2 P4_1.1 P4_1.2 X1.4 X1.5 X1.6 X1_1.4 X1_1.5 X1_1.6 X2.4 X2.5 X2.6 X2_1.4 X2_1.5 X2_1.6 X3.4 X3.5 X3.6 X3_1.4 X3_1.5 X3_1.6 X4.2 X4_1.2 X5.4 X5.5 X5.6 X5_1.4 X5_1.5 X5_1.6 X6.1 X6.4 X6.6 X6.7 X6.8 X6.9 X6.10 X6.11 X6.13 X6.16 X6.17 X6.19 X6.22 X6.25 X6.28 X6.29 X6.30 X6.31 X6.32 X6.33 X6.34 X6.35 X6.36 X6.37 X6.40 X6.42 X6.43 X6.45 X6.46 X6.47 X6.48 X6.49 X6.50 X6_1.1 X6_1.4 X6_1.6 X6_1.7 X6_1.8 X6_1.9 X6_1.10 X6_1.11 X6_1.13 X6_1.16 X6_1.17 X6_1.19 X6_1.22 X6_1.25 X6_1.28 X6_1.29 X6_1.30 X6_1.31 X6_1.32 X6_1.33 X6_1.34 X6_1.35 X6_1.36 X6_1.37 X6_1.40 X6_1.42 X6_1.43 X6_1.45 X6_1.46 X6_1.47 X6_1.48 X6_1.49 X6_1.50
  other v1: 15.3,0.9 30.3,0.9 35.3,0.9 40.3,0.9 60.3,0.9 85.3,0.9 90.3,0.9 95.3,0.9 100.3,0.9 105.3,0.9 110.3,0.9 120.3,0.9 180.3,0.9 32.8,5.9 92.8,5.9 172.8,5.9 177.8,5.9 5.3,10.9 15.3,10.9 20.3,10.9 25.3,10.9 35.3,10.9 40.3,10.9 50.3,10.9 75.3,10.9 95.3,10.9 100.3,10.9 12.8,15.9 17.8,15.9 22.8,15.9 27.8,15.9 32.8,15.9 37.8,15.9 42.8,15.9 47.8,15.9 62.8,15.9 72.8,15.9 77.8,15.9 82.8,15.9 92.8,15.9 97.8,15.9 102.8,15.9 107.8,15.9 112.8,15.9 167.8,15.9 172.8,15.9 15.3,20.9 20.3,20.9 25.3,20.9 30.3,20.9 55.3,20.9 60.3,20.9 65.3,20.9 70.3,20.9 75.3,20.9 80.3,20.9 95.3,20.9 100.3,20.9 105.3,20.9 110.3,20.9 115.3,20.9 92.8,25.9 97.8,25.9 102.8,25.9 107.8,25.9 112.8,25.9 122.8,25.9 127.8,25.9 132.8,25.9 137.8,25.9 80.3,30.9 95.3,30.9 100.3,30.9 115.3,30.9 120.3,30.9 125.3,30.9 130.3,30.9 135.3,30.9 7.8,35.9 12.8,35.9 17.8,35.9 32.8,35.9 62.8,35.9 67.8,35.9 72.8,35.9 82.8,35.9 92.8,35.9 97.8,35.9 112.8,35.9 122.8,35.9 127.8,35.9 132.8,35.9 137.8,35.9 5.3,40.9 70.3,40.9 75.3,40.9 80.3,40.9 85.3,40.9 115.3,40.9 120.3,40.9 125.3,40.9 135.3,40.9 7.8,45.9 32.8,45.9 37.8,45.9 42.8,45.9 47.8,45.9 52.8,45.9 57.8,45.9 92.8,45.9 112.8,45.9 122.8,45.9 127.8,45.9 132.8,45.9 137.8,45.9 142.8,45.9 5.3,50.9 10.3,50.9 20.3,50.9 110.3,50.9 115.3,50.9 125.3,50.9 130.3,50.9 135.3,50.9 140.3,50.9 22.8,55.9 62.8,55.9 77.8,55.9 82.8,55.9 92.8,55.9 112.8,55.9 122.8,55.9 127.8,55.9 137.8,55.9 142.8,55.9 147.8,55.9 20.3,60.9 25.3,60.9 30.3,60.9 35.3,60.9 40.3,60.9 45.3,60.9 50.3,60.9 60.3,60.9 65.3,60.9 75.3,60.9 80.3,60.9 85.3,60.9 115.3,60.9 120.3,60.9 125.3,60.9 135.3,60.9 140.3,60.9 145.3,60.9 22.8,65.9 37.8,65.9 42.8,65.9 47.8,65.9 52.8,65.9 57.8,65.9 62.8,65.9 82.8,65.9 92.8,65.9 112.8,65.9 122.8,65.9 127.8,65.9 132.8,65.9 137.8,65.9 142.8,65.9 40.3,70.9 45.3,70.9 50.3,70.9 60.3,70.9 65.3,70.9 70.3,70.9 75.3,70.9 80.3,70.9 85.3,70.9 110.3,70.9 115.3,70.9 120.3,70.9 125.3,70.9 135.3,70.9 140.3,70.9 145.3,70.9 155.3,70.9 160.3,70.9 42.8,75.9 47.8,75.9 52.8,75.9 57.8,75.9 62.8,75.9 67.8,75.9 92.8,75.9 112.8,75.9 117.8,75.9 122.8,75.9 127.8,75.9 132.8,75.9 137.8,75.9 142.8,75.9 40.3,80.9 45.3,80.9 50.3,80.9 60.3,80.9 65.3,80.9 70.3,80.9 85.3,80.9 100.3,80.9 105.3,80.9 110.3,80.9 120.3,80.9 125.3,80.9 135.3,80.9 140.3,80.9 145.3,80.9 150.3,80.9 160.3,80.9 165.3,80.9 42.8,85.9 47.8,85.9 52.8,85.9 57.8,85.9 62.8,85.9 67.8,85.9 72.8,85.9 92.8,85.9 102.8,85.9 122.8,85.9 127.8,85.9 132.8,85.9 137.8,85.9 142.8,85.9 162.8,85.9 20.3,90.9 25.3,90.9 30.3,90.9 40.3,90.9 45.3,90.9 50.3,90.9 60.3,90.9 65.3,90.9 70.3,90.9 100.3,90.9 135.3,90.9 155.3,90.9 160.3,90.9 165.3,90.9 22.8,95.9 27.8,95.9 37.8,95.9 42.8,95.9 47.8,95.9 52.8,95.9 57.8,95.9 62.8,95.9 87.8,95.9 92.8,95.9 162.8,95.9 50.3,100.9 55.3,100.9 60.3,100.9 65.3,100.9 70.3,100.9 85.3,100.9 165.3,100.9 170.3,100.9 42.8,105.9 47.8,105.9 52.8,105.9 62.8,105.9 67.8,105.9 72.8,105.9 87.8,105.9 92.8,105.9 102.8,105.9 107.8,105.9 112.8,105.9 177.8,105.9 182.8,105.9 50.3,110.9 55.3,110.9 60.3,110.9 65.3,110.9 70.3,110.9 85.3,110.9 90.3,110.9 100.3,110.9 105.3,110.9 110.3,110.9 115.3,110.9 120.3,110.9 125.3,110.9 165.3,110.9 170.3,110.9 175.3,110.9 180.3,110.9 47.8,115.9 52.8,115.9 57.8,115.9 62.8,115.9 67.8,115.9 72.8,115.9 87.8,115.9 92.8,115.9 102.8,115.9 107.8,115.9 112.8,115.9 127.8,115.9 132.8,115.9 147.8,115.9 152.8,115.9 167.8,115.9 172.8,115.9 177.8,115.9 182.8,115.9 50.3,120.9 55.3,120.9 60.3,120.9 65.3,120.9 70.3,120.9 75.3,120.9 85.3,120.9 90.3,120.9 105.3,120.9 47.8,125.9 52.8,125.9 57.8,125.9 62.8,125.9 67.8,125.9 72.8,125.9 77.8,125.9 82.8,125.9 87.8,125.9 92.8,125.9 102.8,125.9 107.8,125.9 112.8,125.9 117.8,125.9 122.8,125.9 127.8,125.9 132.8,125.9 142.8,125.9 147.8,125.9 157.8,125.9 162.8,125.9 172.8,125.9 177.8,125.9 15.3,130.9 70.3,130.9 75.3,130.9 80.3,130.9 85.3,130.9 90.3,130.9 120.3,130.9 125.3,130.9 130.3,130.9 150.3,130.9 155.3,130.9 160.3,130.9 165.3,130.9 170.3,130.9 12.8,135.9 72.8,135.9 77.8,135.9 82.8,135.9 87.8,135.9 92.8,135.9 132.8,135.9 137.8,135.9 147.8,135.9 152.8,135.9 162.8,135.9 172.8,135.9 182.8,135.9 5.3,140.9 10.3,140.9 15.3,140.9 110.3,140.9 115.3,140.9 120.3,140.9 140.3,140.9 150.3,140.9 155.3,140.9 170.3,140.9 175.3,140.9 180.3,140.9 7.8,145.9 12.8,145.9 92.8,145.9 112.8,145.9 137.8,145.9 142.8,145.9 147.8,145.9 152.8,145.9
LED: X3.3 X4.1 | length 9.2
  Bottom Layer w0.508: X4.1@8.077,133.426 8.999,132.504 X3.3@8.999,124.643
OUTT0: D3.10 P5.7 X6.21 | length 66.7
  Top Layer w0.203: P5.7@42.541,44.247 42.541,37.926 48.866,31.601 X6.21@48.866,30.378 50.14,29.105 50.14,21.285 57.277,14.148 71.958,14.148 73.457,12.649 v1(73.457,11.252)
  Bottom Layer w0.203: D3.10@69.229,2.247 71.817,2.247 73.457,3.886 v1(73.457,11.252)
OUTT0_N: D1.60 D3.8 R8.2 | length 147.4
  Bottom Layer w0.127: D3.8@75.079,1.597 75.614,1.597 75.69,1.673 75.69,1.719 75.764,1.793 76.858,1.793 77.969,2.904 79.315,2.904 79.455,2.765 ; R8.2@80.137,2.5 R8.2@79.524,1.887 79.455,1.956 79.455,2.765 ; D1.60@83.332,116.388 83.07,116.651 83.07,117.26 82.858,117.472 81.021,117.472 80.21,118.283 80.21,119.512 81.021,120.323 86.517,120.323 91.697,115.143 91.697,77.47 91.697,8.644 86.152,3.099 86.148,3.099 85.953,2.904 79.594,2.904 79.455,2.765
OUTT0_P: D1.61 D3.7 R8.1 | length 145.9
  Bottom Layer w0.127: D3.7@75.079,2.247 75.614,2.247 75.69,2.17 75.69,2.125 75.764,2.05 76.752,2.05 77.863,3.161 79.323,3.161 79.416,3.254 79.416,3.295 ; R8.1@80.164,3.532 R8.1@79.524,4.173 79.416,4.065 79.416,3.295 ; D1.61@83.332,118.928 83.079,118.674 83.079,117.953 82.855,117.729 81.128,117.729 80.467,118.389 80.467,119.405 81.128,120.066 86.411,120.066 89.429,117.047 89.611,116.865 91.44,115.037 91.44,77.47 91.44,8.75 85.848,3.158 82.664,3.158 79.552,3.159 79.416,3.295
OUTT1: D3.14 P5.8 X6.23 | length 64.1
  Top Layer w0.203: P5.8@40.001,44.247 40.001,37.875 46.326,31.551 X6.23@46.326,30.378 47.6,29.105 47.6,21.59 56.413,12.776 71.679,12.776 72.288,12.167 v1(72.288,11.252)
  Bottom Layer w0.203: D3.14@69.229,4.847 71.141,4.847 72.288,5.994 v1(72.288,11.252)
OUTT1_N: D1.57 D3.4 R6.2 | length 134.3
  Bottom Layer w0.127: D3.4@75.079,4.197 75.614,4.197 75.69,4.273 75.69,4.319 75.764,4.393 76.258,4.393 77.829,5.964 77.829,7.877 78.136,8.185 79.462,8.185 79.524,8.123 79.524,8.11 ; R6.2@79.524,7.17 79.524,8.11 ; D1.57@83.332,108.768 83.304,108.796 83.304,109.634 83.033,109.906 81.196,109.906 80.515,110.587 80.515,111.866 81.351,112.703 86.568,112.703 90.91,108.361 90.91,77.47 90.91,13.944 85.151,8.185 79.598,8.185 79.524,8.11
OUTT1_P: D1.58 D3.3 R6.1 | length 132.6
  Bottom Layer w0.127: D3.3@75.079,4.847 75.614,4.847 75.69,4.77 75.69,4.725 75.764,4.65 76.151,4.65 77.572,6.071 77.572,7.983 78.03,8.442 79.449,8.442 79.524,8.516 ; R6.1@79.524,9.456 79.524,8.516 ; D1.58@83.332,111.308 83.289,111.265 83.289,110.442 83.01,110.163 81.302,110.163 80.772,110.693 80.772,111.76 81.458,112.446 86.462,112.446 89.455,109.453 89.637,109.271 90.653,108.255 90.653,77.47 90.653,14.05 85.044,8.442 79.598,8.442 79.524,8.516